# Altium PCB Primary.PcbDoc
Units mil, origin at the board's own origin, x right, y up, seen from the top; angles counter-clockwise.
Board outline 1890 x 1325 mil, 2 copper layers (Top Layer, Bottom Layer); 11 components, 8 nets, 31 pads, 3 vias.
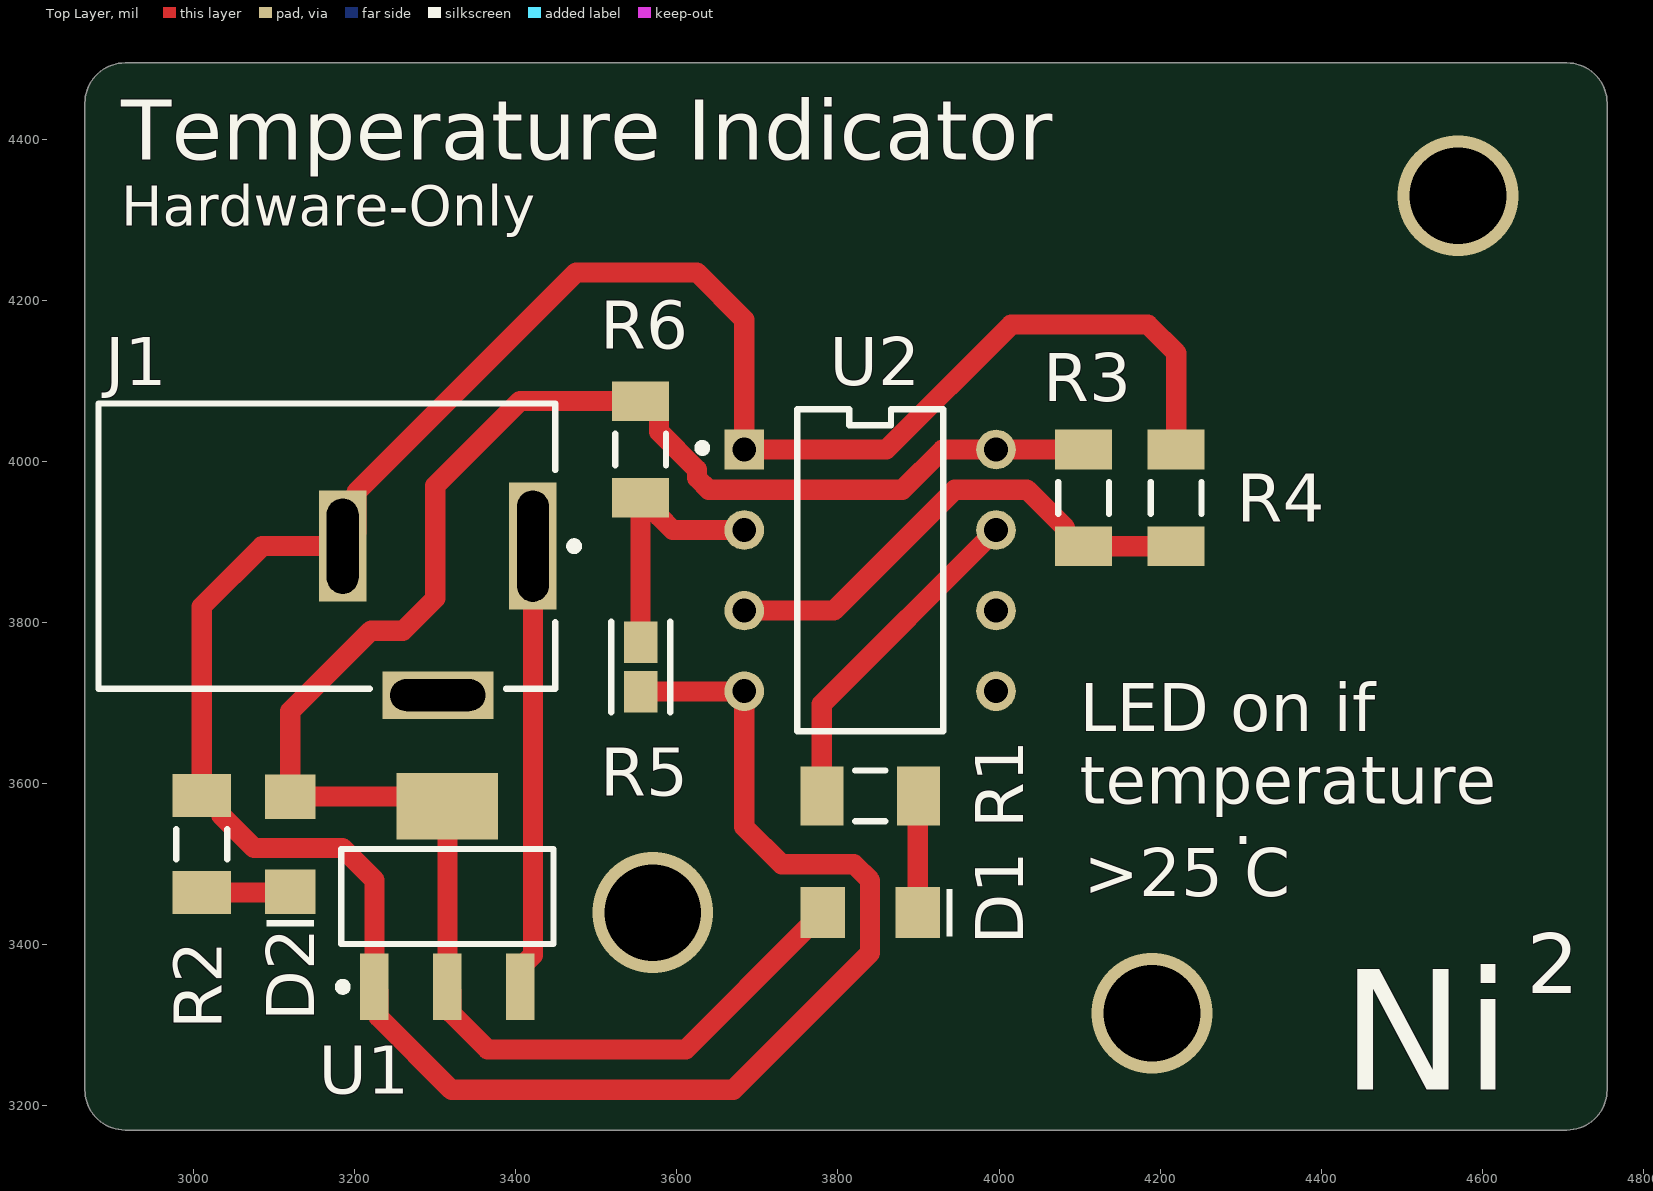
[diagram p0: Top Layer view]
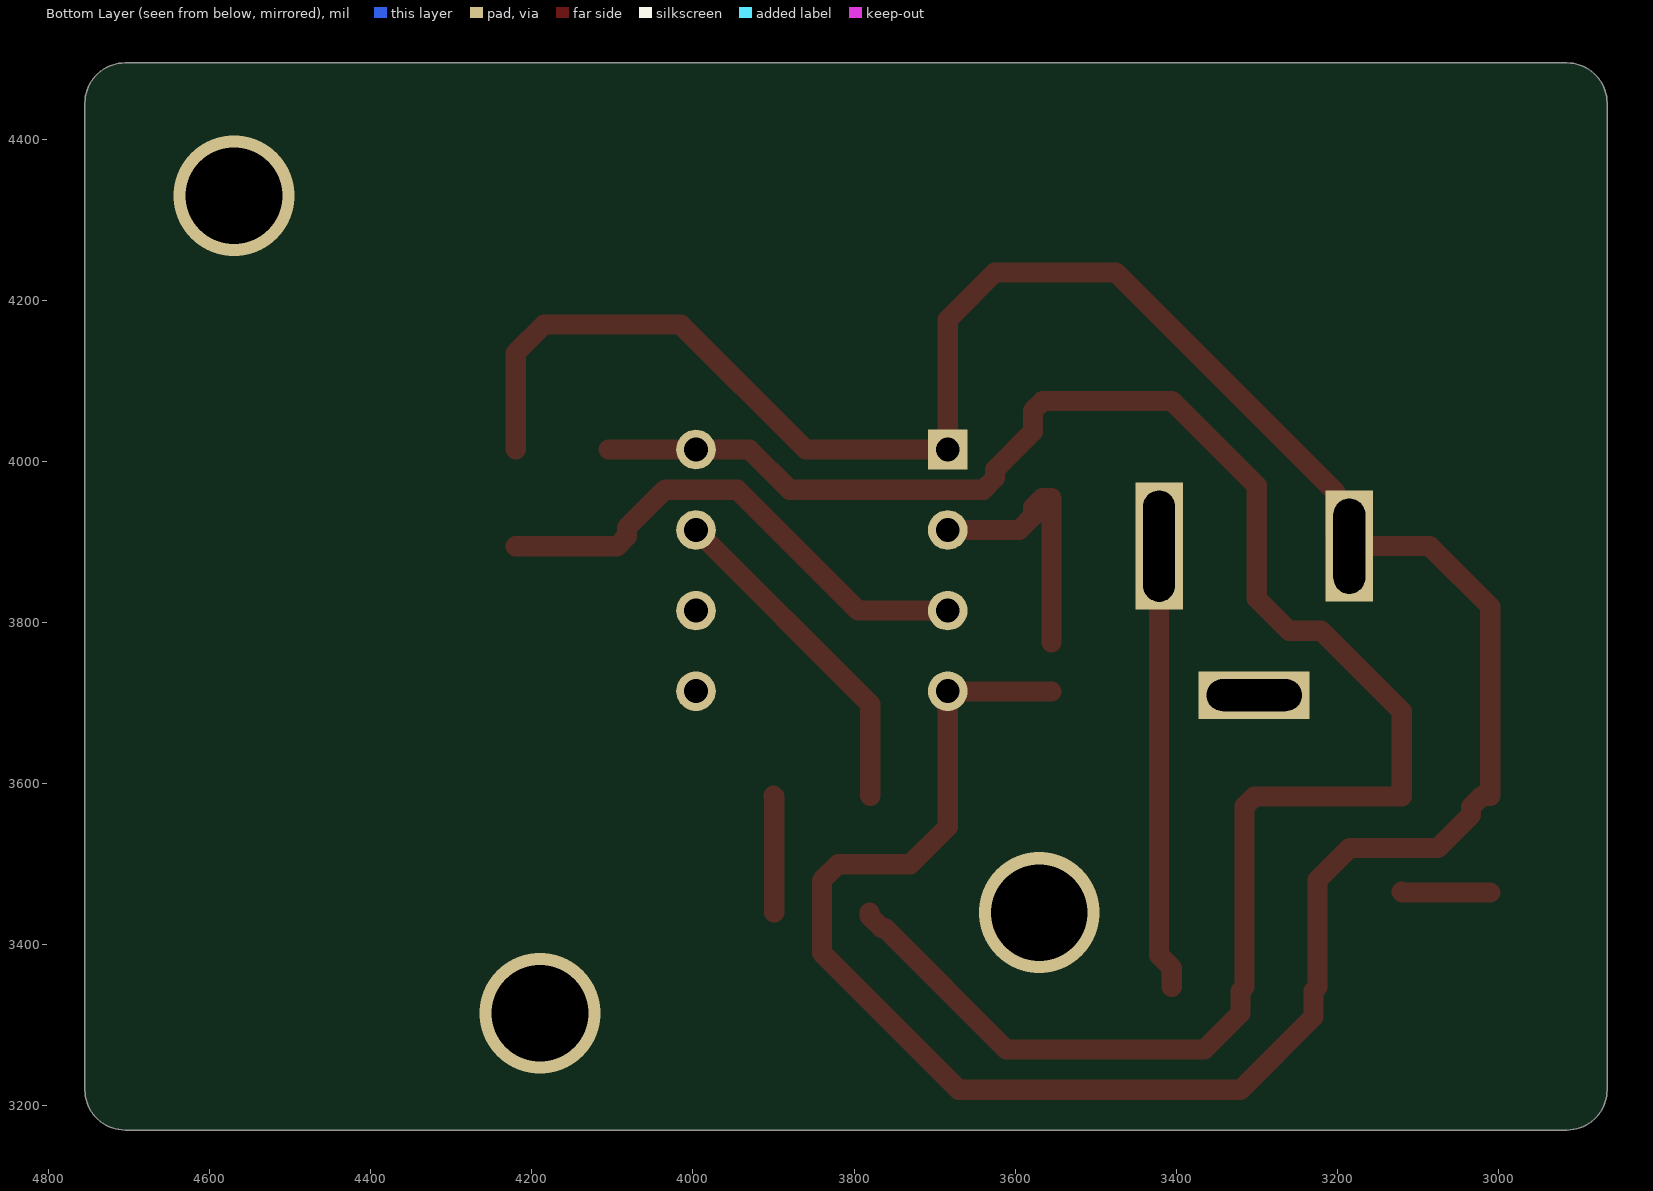
[diagram p1: Bottom Layer view, seen from below]
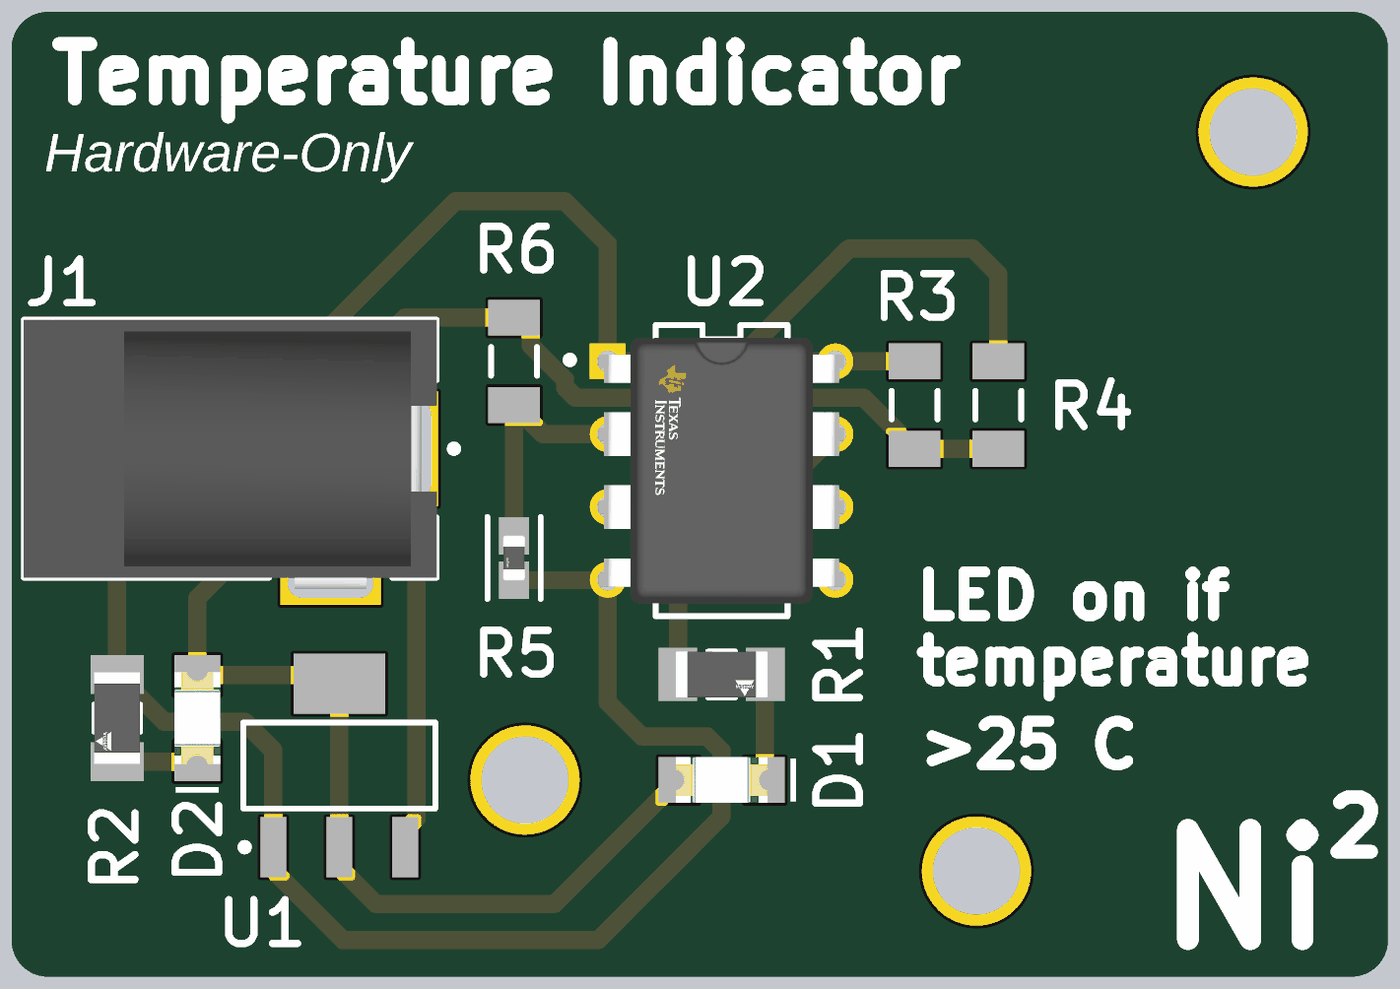
[diagram p2: 3D render of the assembled board from above, using the file's embedded part models]

## Layer stack, top to bottom
Top Solder: solder mask 0.4, Solder Resist, Dk 3.5
Top Layer: signal copper 1.4
Dielectric 1: dielectric 12.6, FR-4, Dk 4.8
Bottom Layer: signal copper 1.4
Bottom Solder: solder mask 0.4, Solder Resist, Dk 3.5

## Board outline
2865,3220 2865,4445 cw(c2915,4445) 2915,4495 4705,4495 cw(c4705,4445) 4755,4445 4755,3220 cw(c4705,3220) 4705,3170 2915,3170 cw(c2915,3220)

## Design rules (kind name [scope] priority, off if disabled: settings)
Clearance [All] p1: gap=10 ignorepadtopadclearanceinfootprint=FALSE
PolygonConnect [All] p1: connectstyle=Relief reliefconductorwidth=10 reliefentries=4 polygonreliefangle="90 Angle" airgapwidth=10
RoutingVias [All] p1: holewidth=28 width=50 viastyle="Through Hole" minholewidth=28 minwidth=50 maxholewidth=28 maxwidth=50
SolderMaskExpansion [All] p1: expansion=4 istentingtop=FALSE
SupplyNets "Schematic Supply Nets_2" [InNet('5V')] p1: voltage=0.000
SupplyNets "Schematic Supply Nets_1" [InNet('GND')] p2: voltage=0.000
SupplyNets "Schematic Supply Nets" [InNet('9V')] p3: voltage=0.000
Width [All] p1: maxlimit=25 minlimit=10 preferedwidth=25 toplayer_minwidth=25 bottomlayer_maxwidth=10 bottomlayer_prefwidth=10 minimp=50.000000 maximp=50.000000 favimp=50.000000
30 further rules are at their usual default settings.

## Classes and differential pairs
component class Primary: D1 D2 J1 R1 R3 R5 R6 U1 U2

## Components (designator, comment, footprint, x,y, rotation, side; value= is the part's Value field where it differs from the comment)
D1 "LED" WL-SMCW_1206_150120xx75000 3840,3440 r180 top
D2 "LED" WL-SMCW_1206_150120xx75000 3120,3525 r90 top
J1 "Power Jack" CUI-PJ-002A_V 3303.11,3895 r180 top
R1 "330Ω" FP-CRCW1206-e3-IPC_A 3840,3585 r0 top
R2 "330Ω" FP-CRCW1206-e3-IPC_A 3010,3525 r270 top
R3 "10kΩ" RESC3116X65X40ML10T20 4105,3955 r270 top
R4 "10kΩ" RESC3116X65X40ML10T20 4220,3955 r90 top
R5 "Thermistor" FP-NCP18-0_15-IPC_A 3555,3745 r270 top
R6 "10kΩ" RESC3116X65X40ML10T20 3555,4015 r270 top
U1 "9V->5V" SOT-223_L 3315,3460 r90 top
U2 "LM311P" FP-P0008A-MFG 3840,3865 r0 top

## Footprints (in the part's own frame and the unit in brackets; to place one, negate y for a bottom-side part, rotate by r counter-clockwise, add the part's x,y. Pads: shape width x height; smd on the part's side, far side on the other; paste and mask are expansions set on the pad)
CUI-PJ-002A_V [mm] "THD, 3-Leads, Body 14.4x9mm, Height 11mm"
  rect 1.5x4 hole 1 slot 3.5 at 90 deg: 1(-3,0)
  rect 1.5x3.5 hole 1 slot 3 at 90 deg: 2(3,0)
  rect 3.5x1.5 hole 1 slot 3 at 0 deg: 3(0,4.7)
  silkscreen extent -4.43,-4.5 10.7,4.5, body extent -3.7,-4.5 10.7,4.9, height 11
FP-CRCW1206-e3-IPC_A [mil]
  rect 53.39x73.16 smd paste+0 mask+0: 1(-60.08,0) 2(60.08,0)
  silkscreen extent -19,-31 19,31, body extent -106,-56 106,56, height 10
FP-NCP18-0_15-IPC_A [mil]
  rect 51.42x41.66 smd paste+0 mask+0: 1(-30.55,0) 2(30.55,0)
  silkscreen extent -56,-37 56,37, body extent -76,-41 76,41, height 10
FP-P0008A-MFG [mm]
  rect 1.25x1.25 hole 0.75 paste-2539.97 mask+0: 1(-3.97,3.81)
  round 1.25 hole 0.75 paste-2539.97 mask+0: 2(-3.97,1.27) 3(-3.97,-1.27) 4(-3.97,-3.81) 5(3.97,-3.81) 6(3.97,-1.27) 7(3.97,1.27) 8(3.97,3.81)
  silkscreen extent -5.42,-5.08 2.3,5.08, body extent -4.69,-5.18 4.69,5.18, height 0.25
RESC3116X65X40ML10T20 [mm] "Chip Resistor, 2-Leads, Body 3.10x1.60mm, IPC Low Density"
  rect 1.25x1.8 smd: 1(-1.525,0) 2(1.525,0)
  silkscreen extent -0.5,-0.8 0.5,0.8, body extent -1.6,-0.85 1.6,0.85, height 0.65
SOT-223_L [mm] "SOT223, 4-Leads, Body 6.5x3.5mm, Pitch 2.3mm, Lead Span 7mm, IPC High Density"
  rect 2.1x0.9 smd: 1(-2.85,2.3) 2(-2.85,0) 3(-2.85,-2.3)
  rect 2.1x3.2 smd: 4(2.85,0)
  silkscreen extent -2.97,-3.35 1.5,3.42, body extent -1.85,-3.35 1.85,3.35, height 1.8
WL-SMCW_1206_150120xx75000 [mm] "SMD Mono-color Chip LED, body 3.2x1.6mm"
  rect 1.4x1.6 smd: 1(-1.5,0) 2(1.5,0)
  silkscreen extent -2.6,-0.75 -2.4,0.75, body extent -1.6,-0.8 1.6,0.8, height 0.68

## Part data
D1 D2: library part CMP-1426-00013-4, "WL-SMCW SMT Mono-Color Chip LED Waterclear", Case Code (Imperial)=1206, Case Code (Metric)=3216, Color=Red, Forward Current=100mA, Forward Voltage=2V, Max Junction Temperature (Tj)=95°C, Max Operating Temperature=85°C, Max Reverse Voltage (DC)=5V, Min Operating Temperature=-40°C, Power Dissipation=72mW, Test Current=20mA, Case/Package=1206, Dominant Wavelength=625nm, Height=680µm, Length=3.2mm, Lens Style="Clear, Rectangular", Luminous Intensity=150mcd, Mount="Surface Mount", Packaging="Tape and Reel", Peak Wavelength=630nm, REACH SVHC=Unknown, Reverse Voltage=5V, RoHS=Compliant, Viewing Angle=140°, Wavelength=625nm, Width=1.6mm
J1: library part CMP-2000-06895-2, "Through Hole Right Angle DC Power Jack, 2.5 A, 2 mm Center Pin, 3 Position, -25 to 85 degC, RoHS, Bulk", Current Rating=2.5A, Flammability Rating=UL94V-0, Insulation Resistance=50MOhms, Manufacturer=CUIInc., Operating Temperature Range=-25Cto+85C, Package Description="3-Pin Through Hole Device, Body 14.4 x 9 mm, Height 11 mm", Package Reference=PJ-002A, Voltage Rating=24V, Brand=CUI, Connector Type=DCPowerJack, Contact Gender=Male, Contact Material=Copper, Contact Plating=Nickel, Datasheet URL=http://www.cui.com/product/resource/pj-002a.pdf, Datasheet Version="Rev. 1.03, 04/2016", Factory Pack Quantity=500, Housing Material=PolybutyleneTerephthalate(PBT), Inside Contact Diameter=2mm, Manufacturer URL=http://www.cui.com/, Mounting Angle=Right, Mounting Style=ThroughHole, Mounting Technology=ThroughHole, Outside Contact Diameter=6.5mm, Product=Jacks, Product Category=DCPowerConnectors, RoHS=True, Termination Style=ThroughHole
R1 R2: library part CMP-2003-02098-2, "RES Thick Film, 330Ω, 1%, 0.25W, 100ppm/°C, 1206", Case Code (Imperial)=1206, Case Code (Metric)=3216, Max Operating Temperature=155°C, Max Power Dissipation=250mW, Min Operating Temperature=-55°C, Package Quantity=10, Resistance=330R, Temperature Coefficient=100ppm/°C, Tolerance=1%, Voltage Rating=200V, Case/Package=1206, Composition="Thick Film", Contact Plating=Tin, Depth=1.6mm, Features="Automotive AEC-Q200", Height=0.55mm, Lead Free="Lead Free", Length=3.2mm, Military Standard=Not, Mount="Surface Mount", Number of Terminations=2, Packaging="Tape and Reel", Power Rating=250mW, Radiation Hardening=No, Termination=SMD/SMT, Voltage Rating (DC)=200V, Weight=0.000353oz, Width=1.6mm
R3 R4 R6: library part CMP-1014-00623-2, "Chip Resistor, 10 KOhm, +/- 1%, 0.25 W, -55 to 155 degC, 1206 (3216 Metric), RoHS, Tape and Reel", Case Code (Imperial)=1206, Case Code (Metric)=3216, Manufacturer=Yageo, Max Operating Temperature=155degC, Min Operating Temperature=-55degC, Package Description="2-Pin Surface Mount Device, Body 3.1 x 1.6 mm", Package Quantity=5000, Package Reference=1206.0, Power Rating=250mW, Resistance=10KOhm, Temperature Coefficient=100ppm/degreesC, Tolerance=1%, Voltage Rating=200V, Case/Package=1206, Composition=ThickFilm, Datasheet URL=http://www.yageo.com/NewPortal/yageodocoutput?fileName=/pdf/R-Chip/PYu-RC_Group_51_RoHS_L_5.pdf, Datasheet Version="Rev. 5, 10/2016", Depth=1.6mm, Height=0.55mm, Lead Free=LeadFree, Length=3.1mm, Manufacturer URL=http://www.yageo.com/, Military Standard=Not, Packaging=TapeandReel, REACH SVHC=Unknown, RoHSCompliant=true, Termination=SMD/SMT, Width=1.6mm
R5: library part CMP-2000-05271-3, "NTC Thermistor for Temperature Sensor, 0603, 10kΩ, 1%, 0.1mA, 5V", Case Code (Imperial)=0603, Case Code (Metric)=1608, Current Rating=310uA, Manufacturer Series=NCP18, Max Operating Temperature=125°C, Max Power Dissipation=100mW, Min Operating Temperature=-40°C, Package Quantity=1, Package Shape=Rectangular, Resistance=10kR, Resistance Tolerance=1%, Accuracy=0.7%, Case/Package=0603, Depth=0.8mm, Height=0.8mm, Lead Free="Lead Free", Length=1.6mm, Mount="Surface Mount", Number of Pins=2, Number of Terminals/Pins=2, Packaging="Tape and Reel", Power Rating=100mW, Radiation Hardening=No, REACH SVHC="No SVHC", RoHS Compliant=Yes, Series=NCP, Terminal Finish=Tin, Terminal Placement=Dual, Termination=SMD/SMT, Thermistor Application="TEMPERATURE COMPENSATION", Tolerance=1%
U1: library part CMP-0244-00312-1, "Fixed Low Drop Positive Voltage Regulator, 5V, 4-Pin SOT-223, Tape and Reel", ComponentLink1Description="Manufacturer URL", ComponentLink1URL=http://www.st.com, ComponentLink2Description=Datasheet, ComponentLink2URL=http://www.st.com/internet/com/TECHNICAL_RESOURCES/TECHNICAL_LITERATURE/DATASHEET/CD00000544.pdf, DatasheetVersion=1/11/2011, PackageDescription="4-Pin SOT-223 Package, 6.5 x 3.5 mm Body, 2.3 mm Pitch, 7 mm Lead Span", PackageReference=SOT-223, PackageVersion=2010
U2: library part CMP-1685-00016-2, Ambient Temperature Range High=70°C, Case Code (Imperial)=0603, Case Code (Metric)=1608, Case/Package=PDIP, Dual Supply Voltage=9V, Input Bias Current=250nA, Input Offset Voltage (Vos)=2mV, Manufacturer Lifecycle Status=ACTIVE, Max Dual Supply Voltage=15V, Max Junction Temperature (Tj)=150°C, Max Output Voltage=7.5mV, Max Power Dissipation=500mW, Max Supply Current=7.5mA, Max Supply Voltage=30V, Min Dual Supply Voltage=1.75V, Min Operating Temperature=0°C, Min Supply Voltage=3.5V, Operating Supply Voltage=28V, Output Current=50mA, Power Rating=100mW, Resistance=390Ω, Tolerance=1%, Voltage Gain=106.02dB, Voltage Rating=75V, Contact Plating=Gold, Height=5.08mm, Lead Free="Lead Free", Length=9.81mm, Lifecycle Status=Production, Max Input Current=250nA, Max Operating Temperature=70°C, Mount="Surface Mount, Through Hole", NexarPartId=24336, Nominal Supply Current=7.5mA, Number of Channels=1, Number of Circuits=1, Number of Elements=1, Number of Pins=8, Output Current per Channel=50mA, Output Type=TTL, Packaging="Tape and Reel", Propagation Delay=115ns, Quiescent Current=7.5mA, Radiation Hardening=No, REACH SVHC="No SVHC", Response Time=165ns, RoHS=Compliant, Schedule B="8542390000, 8542390000", Thickness=3.9mm, Turn-On Delay Time=115ns, Type="General Purpose", Weight=2.012816mg, Width=6.35mm

## Via types
v1: diameter 150, hole 120, Top Layer to Bottom Layer, 3 vias

## Nets (pads, with @x,y where several pads share a name; then routed paths per layer and width w, separated by ;. In a path a pad name is that pad's centre, name@x,y a point inside that pad or via, vN(x,y) a via of type N, cw(c..) or ccw(c..) an arc to the next point about the centre after c; other vN are vias at no path point)
5V: D1.2 D2.2 R3.1 R6.1 U1.2 U1.4 U2.8 | length 2431.5
  Top Layer w25: D1.2 3780.94,3436.06 3765.89,3421 3761.95,3421 3610.94,3270 3365,3270 3320.22,3314.78 3320.22,3342.58 U1.2 U1.4 3303.15,3584.06 D2.2 3120,3690 3220,3790 3260,3790 3300,3830 3300,3970 3405.04,4075.04 R6.1 3565.83,4075.04 3577.93,4062.93 3577.93,4037.07 3625,3990 3625,3979.64 3639.64,3965 3880,3965 3930,4015 U2.8 U2.8 R3.1
9V: J1.1 U1.3 | length 553.7
  Top Layer w25: U1.3 3405.55,3371.42 3421.22,3387.09 J1.1
DIV_CONST_OUT: R3.2 R4.1 U2.3 | length 633.8
  Top Layer w25: U2.3 3795,3815 3945,3965 4034.96,3965 4082.07,3917.89 4082.07,3907.07 4094.17,3894.96 R3.2 R4.1
DIV_THERM_OUT: R5.1 R6.2 U2.2 | length 331
  Top Layer w25: R5.1 R6.2 3565.83,3954.96 3577.93,3942.85 3577.93,3932.03 3594.96,3915 U2.2
GND: J1.2 R2.1 R4.2 R5.2 U1.1 U2.1 U2.4 | length 3755.9
  Top Layer w25: R5.2 3683.15,3714.45 U2.4 3683.7,3546.3 3730,3500 3820,3500 3840,3480 3840,3390 3670,3220 3320,3220 3229.67,3310.33 3229.67,3342.58 U1.1 3224.45,3480.55 3185,3520 3075.08,3520 3034.08,3561 3034.08,3570.89 3019.89,3585.08 R2.1 3010,3820 3085,3895 J1.2 3202.03,3912.03 3202.03,3962.03 3475,4235 3625,4235 3683.7,4176.3 U2.1 3860,4015 4015,4170 4185,4170 4220,4135 R4.2
NetD1_1: D1.1 R1.2 | length 145.4
  Top Layer w25: D1.1 3899.06,3583.97 R1.2
NetD2_1: D2.1 R2.2 | length 110.4
  Top Layer w25: R2.2 3118.97,3464.92 D2.1
NetR1_1: R1.1 U2.7 | length 419.6
  Top Layer w25: R1.1 3779.92,3698.62 U2.7
pads on no net: J1.3 U2.5 U2.6
copper on no net:
  other v1: 4190,3315 3570,3440 4570,4330

## Silkscreen, mask and mechanical layers (free items; w line width, h text height)
Top Overlay:
  text "Temperature Indicator" at 2910,4374.99 h75
  text "Hardware-Only" at 2910,4276 h85
  text "LED on if" at 4100,3665 h60
  text "temperature" at 4100,3574.99 h60
  text "." at 4290,3525 h60
  text ">25 C" at 4105,3460 h60
  text "2" at 4655,3340 h75
  text "Ni" at 4425,3220 h150
Mechanical 1:
  the board outline again, w10